# Altium PCB hotV1.1.PcbDoc
Units mil, origin at the board's own origin, x right, y up, seen from the top; angles counter-clockwise.
Board outline 722.05 x 826.77 mil, 2 copper layers (Top Layer, Bottom Layer), stack 77.603 mil thick; 4 components, 3 nets, 4 pads, 46 vias.
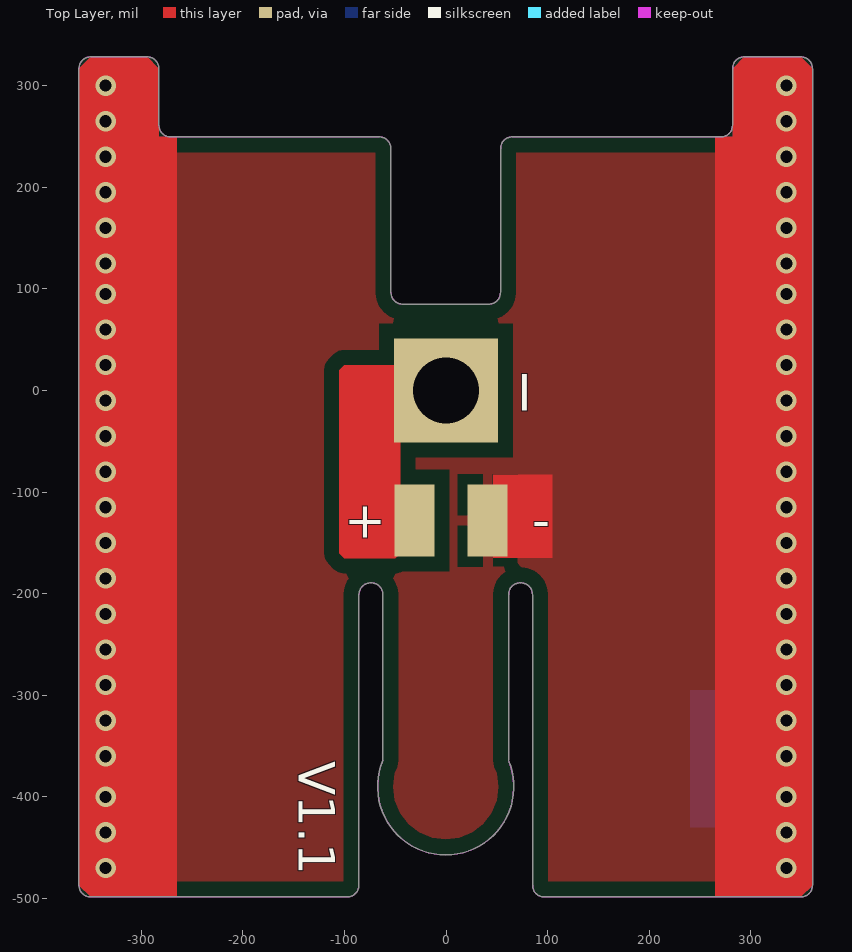
[diagram p0: Top Layer view]
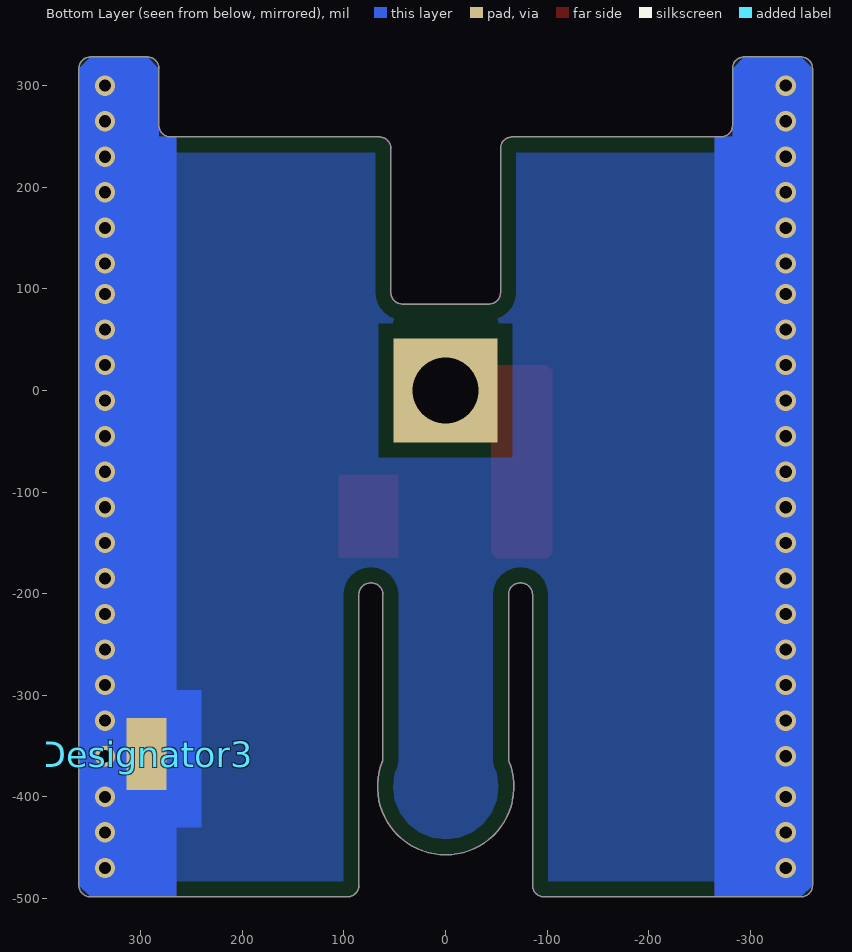
[diagram p1: Bottom Layer view, seen from below]

## Layer stack, top to bottom
Top Solder: solder mask 0.4, Solder Resist, Dk 3.5
Top Layer: signal copper 1.4
Dielectric1: core 74.8031, FR-4, Dk 4.8
Bottom Layer: signal copper 1.4
Bottom Solder: solder mask 0.4, Solder Resist, Dk 3.5

## Board outline
-349.8,-498.5 cw(c-349.8,-486.99) -361.31,-486.99 -361.31,316.77 cw(c-349.8,316.77) -349.8,328.27 -294.07,328.27 cw(c-294.07,316.77) -282.57,316.77 -282.57,261.04 ccw(c-271.06,261.04) -271.06,249.53 -65.73,249.53 cw(c-65.73,238.03) -54.22,238.03 -54.22,96.47 ccw(c-42.72,96.47) -42.72,84.97 42.15,84.97 ccw(c42.15,96.47) 53.65,96.47 53.65,238.03 cw(c65.16,238.03) 65.16,249.53 270.49,249.53 ccw(c270.49,261.04) 282,261.04 282,316.77 cw(c293.5,316.77) 293.5,328.27 349.23,328.27 cw(c349.23,316.77) 360.74,316.77 360.74,-486.99 cw(c349.23,-486.99) 349.23,-498.5 96.65,-498.5 cw(c96.65,-486.99) 85.15,-486.99 85.15,-200.95 ccw(c73.64,-200.95) 73.64,-189.44 73.03,-189.44 ccw(c73.03,-200.95) 61.53,-200.95 61.53,-364.1 cw(c-0.29,-390.13) -62.1,-364.1 -62.1,-200.95 ccw(c-73.6,-200.95) -73.6,-189.44 -74.21,-189.44 ccw(c-74.21,-200.95) -85.72,-200.95 -85.72,-486.99 cw(c-97.22,-486.99) -97.22,-498.5

## Design rules (kind name [scope] priority, off if disabled: settings)
Clearance Clearance_1 [HasPad('Free-1')] p1: gap=78.74
Clearance [All] p2: gap=10
ComponentClearance [All] p1 off: gap=10 collisioncheckmode=3 verticalgap=10 showdistances=FALSE
HoleSize [All] p1: absolutevalues=TRUE maxlimit=808.66 minlimit=1 maxpercent=80.000 minpercent=20.000
HoleToHoleClearance [All] p1: gap=1 allowstackedmicrovias=TRUE
MinimumSolderMaskSliver [All] p1: minsoldermaskwidth=-1
PolygonConnect pad [IsVia] p1: connectstyle=Direct reliefconductorwidth=10 reliefentries=4 polygonreliefangle="90 Angle" airgapwidth=10
PolygonConnect [All] p2: connectstyle=Relief reliefconductorwidth=10 reliefentries=4 polygonreliefangle="90 Angle" airgapwidth=10
RoutingVias [All] p1: holewidth=421.69 width=404.33 viastyle="Through Hole" minholewidth=2.8 minwidth=10.63 maxholewidth=28 maxwidth=50
SilkToSilkClearance [All] p1: silktosilkclearance=-10
SilkToSolderMaskClearance SilkscreenOverComponentPads [IsPad] p1 off: minsilkscreentomaskgap=0 clearancetoexposedcopper=TRUE
SolderMaskExpansion [All] p1: expansion=4
Width [All] p1: maxlimit=403.7 minlimit=4.94 preferedwidth=10 minimp=50.000000 maximp=50.000000 favimp=50.000000
24 further rules are at their usual default settings.

## Components (designator, comment, footprint, x,y, rotation, side; value= is the part's Value field where it differs from the comment)
+ "T1" PIN#1 -30,-125 r0 top (schematic designator PIN)
- "T3" PIN#1 40,-131 r180 top (schematic designator GND)
Designator3 "Comment" PIN#2 295,-355 r0 top
I "T2" POGOPIN 0,0 r90 top (schematic designator POGOPIN)

## Footprints (in the part's own frame and the unit in brackets; to place one, negate y for a bottom-side part, rotate by r counter-clockwise, add the part's x,y. Pads: shape width x height; smd on the part's side, far side on the other; paste and mask are expansions set on the pad)
PIN#1 [mil]
  rect 39.37x71 smd: 1(-1,-3)
PIN#2 [mil]
  rect 39.37x71 smd far side: 1(-1,-3)
POGOPIN [mm]
  rect 2.6x2.6 hole 1.65: 1(0,0)

## Part data
+ - I: library part TEST_POINT

## Via types
v1: diameter 20, hole 12, Top Layer to Bottom Layer, 46 vias

## Nets (pads, with @x,y where several pads share a name; then routed paths per layer and width w, separated by ;. In a path a pad name is that pad's centre, name@x,y a point inside that pad or via, vN(x,y) a via of type N, cw(c..) or ccw(c..) an arc to the next point about the centre after c; other vN are vias at no path point)
GND: -.1 Designator3.1 | length 41.8
  Bottom Layer w12: Designator3.1 333,-358 v1(335,-360)
  other v1: -335,-470 335,-470 -335,-435 335,-435 -335,-400 335,-400 -335,-360 -335,-325 335,-325 -335,-290 335,-290 -335,-255 335,-255 -335,-220 335,-220 -335,-185 335,-185 -335,-150 335,-150 -335,-115 335,-115 -335,-80 335,-80 -335,-45 335,-45 -335,-10 335,-10 -335,25 335,25 -335,60 335,60 -335,95 335,95 -335,125 335,125 -335,160 335,160 -335,195 335,195 -335,230 335,230 -335,265 335,265 -335,300 335,300
PIN: +.1 I.1
POGOPIN: 

## Polygon pours and split planes (outlines as drawn)
GND on Top Layer "Top Layer-No Net" (solid, remove dead copper, pour order 0): -349.8,-498.5 cw(c-349.8,-486.99) -361.31,-486.99 -361.31,316.77 cw(c-349.8,316.77) -349.8,328.27 -294.07,328.27 cw(c-294.07,316.77) -282.57,316.77 -282.57,261.04 ccw(c-271.06,261.04) -271.06,249.53 -65.73,249.53 cw(c-65.73,238.03) -54.22,238.03 -54.22,96.47 ccw(c-42.72,96.47) -42.72,84.97 42.15,84.97 ccw(c42.15,96.47) 53.65,96.47 53.65,238.03 cw(c65.16,238.03) 65.16,249.53 270.49,249.53 ccw(c270.49,261.04) 282,261.04 282,316.77 cw(c293.5,316.77) 293.5,328.27 349.23,328.27 cw(c349.23,316.77) 360.74,316.77 360.74,-486.99 cw(c349.23,-486.99) 349.23,-498.5 96.65,-498.5 cw(c96.65,-486.99) 85.15,-486.99 85.15,-200.95 ccw(c73.64,-200.95) 73.64,-189.44 73.03,-189.44 ccw(c73.03,-200.95) 61.53,-200.95 61.53,-364.1 cw(c-0.29,-390.13) -62.1,-364.1 -62.1,-200.95 ccw(c-73.6,-200.95) -73.6,-189.44 -74.21,-189.44 ccw(c-74.21,-200.95) -85.72,-200.95 -85.72,-486.99 cw(c-97.22,-486.99) -97.22,-498.5
GND on Bottom Layer "Top Layer-No Net1" (solid, remove dead copper, pour order 1): -349.8,-498.5 cw(c-349.8,-486.99) -361.31,-486.99 -361.31,316.77 cw(c-349.8,316.77) -349.8,328.27 -294.07,328.27 cw(c-294.07,316.77) -282.57,316.77 -282.57,261.04 ccw(c-271.06,261.04) -271.06,249.53 -65.73,249.53 cw(c-65.73,238.03) -54.22,238.03 -54.22,96.47 ccw(c-42.72,96.47) -42.72,84.97 42.15,84.97 ccw(c42.15,96.47) 53.65,96.47 53.65,238.03 cw(c65.16,238.03) 65.16,249.53 270.49,249.53 ccw(c270.49,261.04) 282,261.04 282,316.77 cw(c293.5,316.77) 293.5,328.27 349.23,328.27 cw(c349.23,316.77) 360.74,316.77 360.74,-486.99 cw(c349.23,-486.99) 349.23,-498.5 96.65,-498.5 cw(c96.65,-486.99) 85.15,-486.99 85.15,-200.95 ccw(c73.64,-200.95) 73.64,-189.44 73.03,-189.44 ccw(c73.03,-200.95) 61.53,-200.95 61.53,-364.1 cw(c-0.29,-390.13) -62.1,-364.1 -62.1,-200.95 ccw(c-73.6,-200.95) -73.6,-189.44 -74.21,-189.44 ccw(c-74.21,-200.95) -85.72,-200.95 -85.72,-486.99 cw(c-97.22,-486.99) -97.22,-498.5

## Keep-outs
Keep-Out Layer:
  lines w0.5: -361.31,-486.99 ccw(c-349.8,-486.99) -349.8,-498.5 -97.22,-498.5 ccw(c-97.22,-486.99) -85.72,-486.99 -85.72,-200.95 cw(c-74.21,-200.95) -74.21,-189.44 -73.6,-189.44 cw(c-73.6,-200.95) -62.1,-200.95 -62.1,-364.1 ccw(c-0.29,-390.13) 61.53,-364.1 61.53,-200.95 cw(c73.03,-200.95) 73.03,-189.44 73.64,-189.44 cw(c73.64,-200.95) 85.15,-200.95 85.15,-486.99 ccw(c96.65,-486.99) 96.65,-498.5 349.23,-498.5 ccw(c349.23,-486.99) 360.74,-486.99 360.74,316.77 ccw(c349.23,316.77) 349.23,328.27 293.5,328.27 ccw(c293.5,316.77) 282,316.77 282,261.04 cw(c270.49,261.04) 270.49,249.53 65.16,249.53 ccw(c65.16,238.03) 53.65,238.03 53.65,96.47 cw(c42.15,96.47) 42.15,84.97 -0.29,84.97 -42.72,84.97 cw(c-42.72,96.47) -54.22,96.47 -54.22,238.03 ccw(c-65.73,238.03) -65.73,249.53 -271.06,249.53 cw(c-271.06,261.04) -282.57,261.04 -282.57,316.77 ccw(c-294.07,316.77) -294.07,328.27 -349.8,328.27 ccw(c-349.8,316.77) -361.31,316.77 -361.31,-486.99

## Other copper
Top Layer:
  rectangle net GND: 46.01,-165 105,-82.5
  rectangle net GND: 50,-145 100,-105
  region net PIN: -100,25 -45,25 -45,-160 -50,-165 -100,-165 -105,-160 -105,20
  region net GND: -349.8,328.27 -294.07,328.27 -282.57,316.77 -282.57,249.53 -265,249.53 -265,-498.5 -349.8,-498.5 -361.31,-486.99 -361.31,316.77
  region net GND: 265,249.53 282,249.53 282,316.77 293.5,328.27 349.23,328.27 360.74,316.77 360.74,-486.99 349.23,-498.5 265,-498.5
Bottom Layer:
  rectangle net GND: 240,-430 350,-295
  region net GND: -349.8,328.27 -294.07,328.27 -282.57,316.77 -282.57,249.53 -265,249.53 -265,-498.5 -349.8,-498.5 -361.31,-486.99 -361.31,316.77
  region net GND: 265,249.53 282,249.53 282,316.77 293.5,328.27 349.23,328.27 360.74,316.77 360.74,-486.99 349.23,-498.5 265,-498.5

## Silkscreen, mask and mechanical layers (free items; w line width, h text height)
Top Overlay:
  text "V1.1" at -145,-365 h36 r270
Top Solder:
  rectangle: 40,-160 80,-95
  rectangle: -70,-160 -15,-95
  region: -349.8,328.27 -282.57,328.27 -282.57,249.53 -260,249.53 -260,-498.5 -349.8,-498.5 -361.31,-486.99 -361.31,316.77
  region: 255,249.53 282,249.53 282,328.27 349.23,328.27 360.74,316.77 360.74,-486.99 349.23,-498.5 255,-498.5
  text "HotShoe Adapter" at -210,145 h48 r270
  text "Joyton" at 165,20 h54 r270
Bottom Solder:
  region: -349.8,328.27 -282.57,328.27 -282.57,249.53 -260,249.53 -260,-498.5 -349.8,-498.5 -361.31,-486.99 -361.31,316.77
  region: 255,249.53 282,249.53 282,328.27 349.23,328.27 360.74,316.77 360.74,-486.99 349.23,-498.5 255,-498.5